# EAGLE board IR Interface Board (EAGLE 7.7.0)
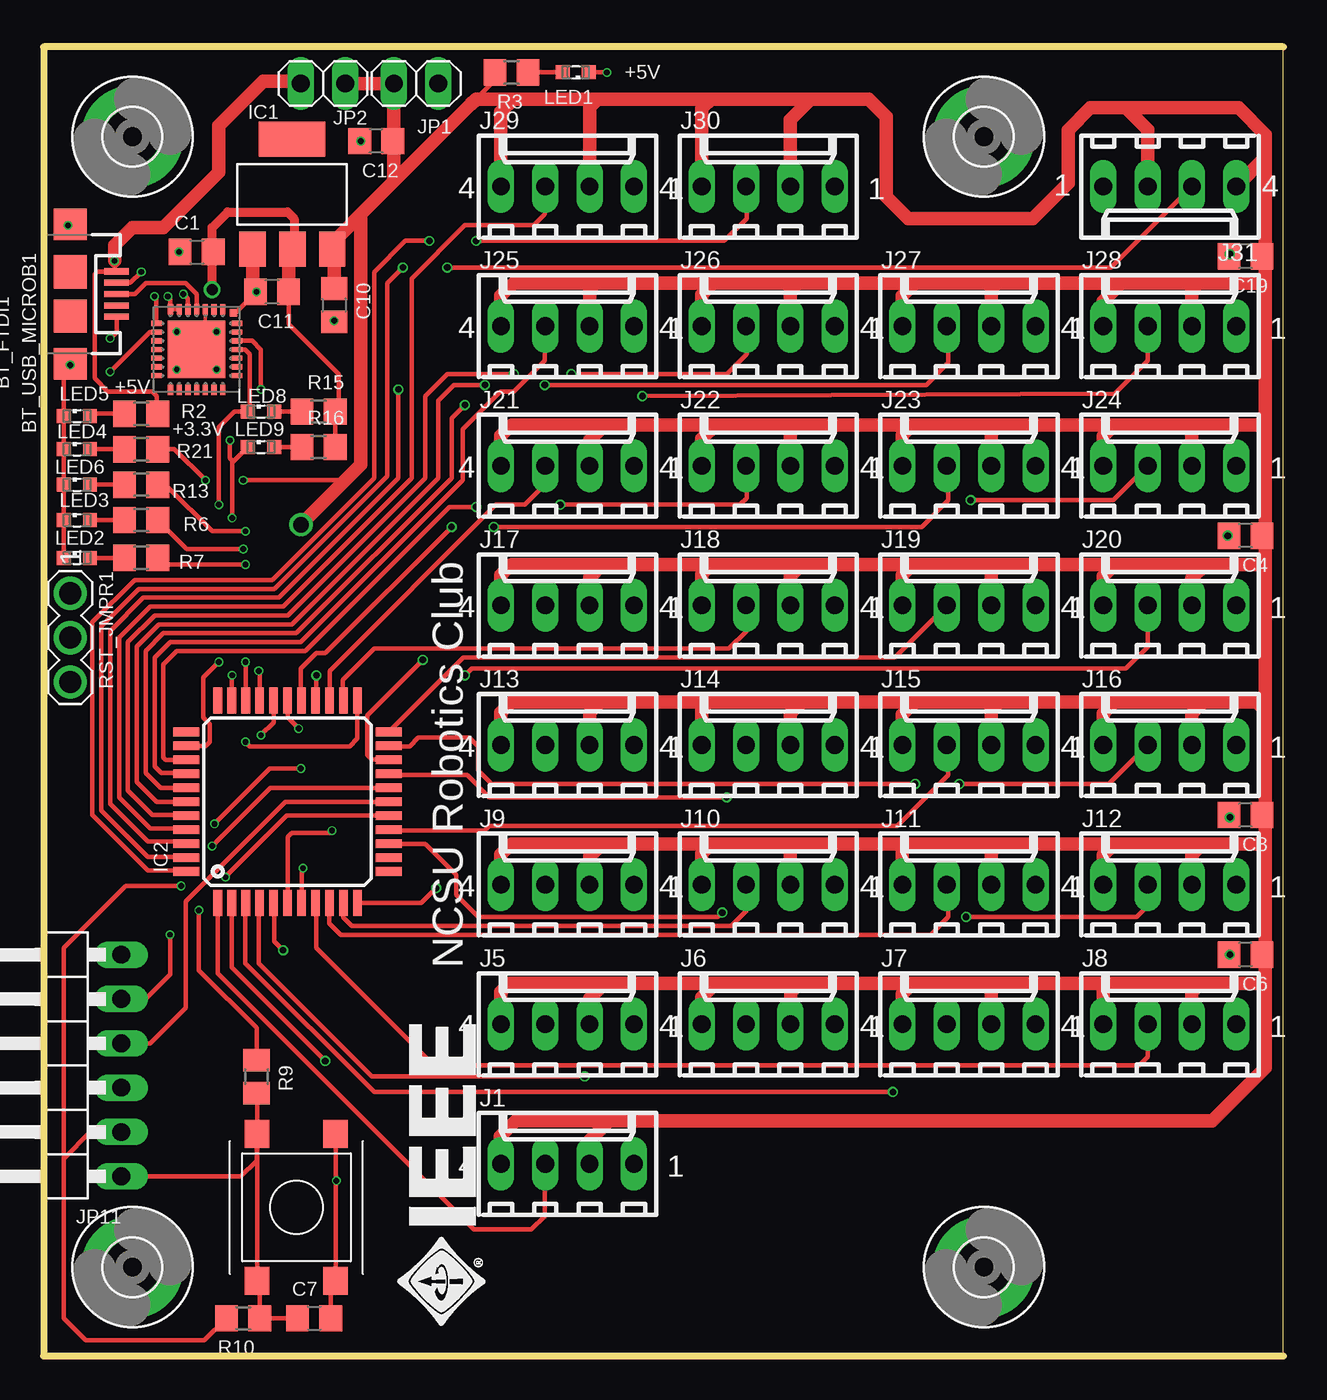
[diagram p0: board, top side]
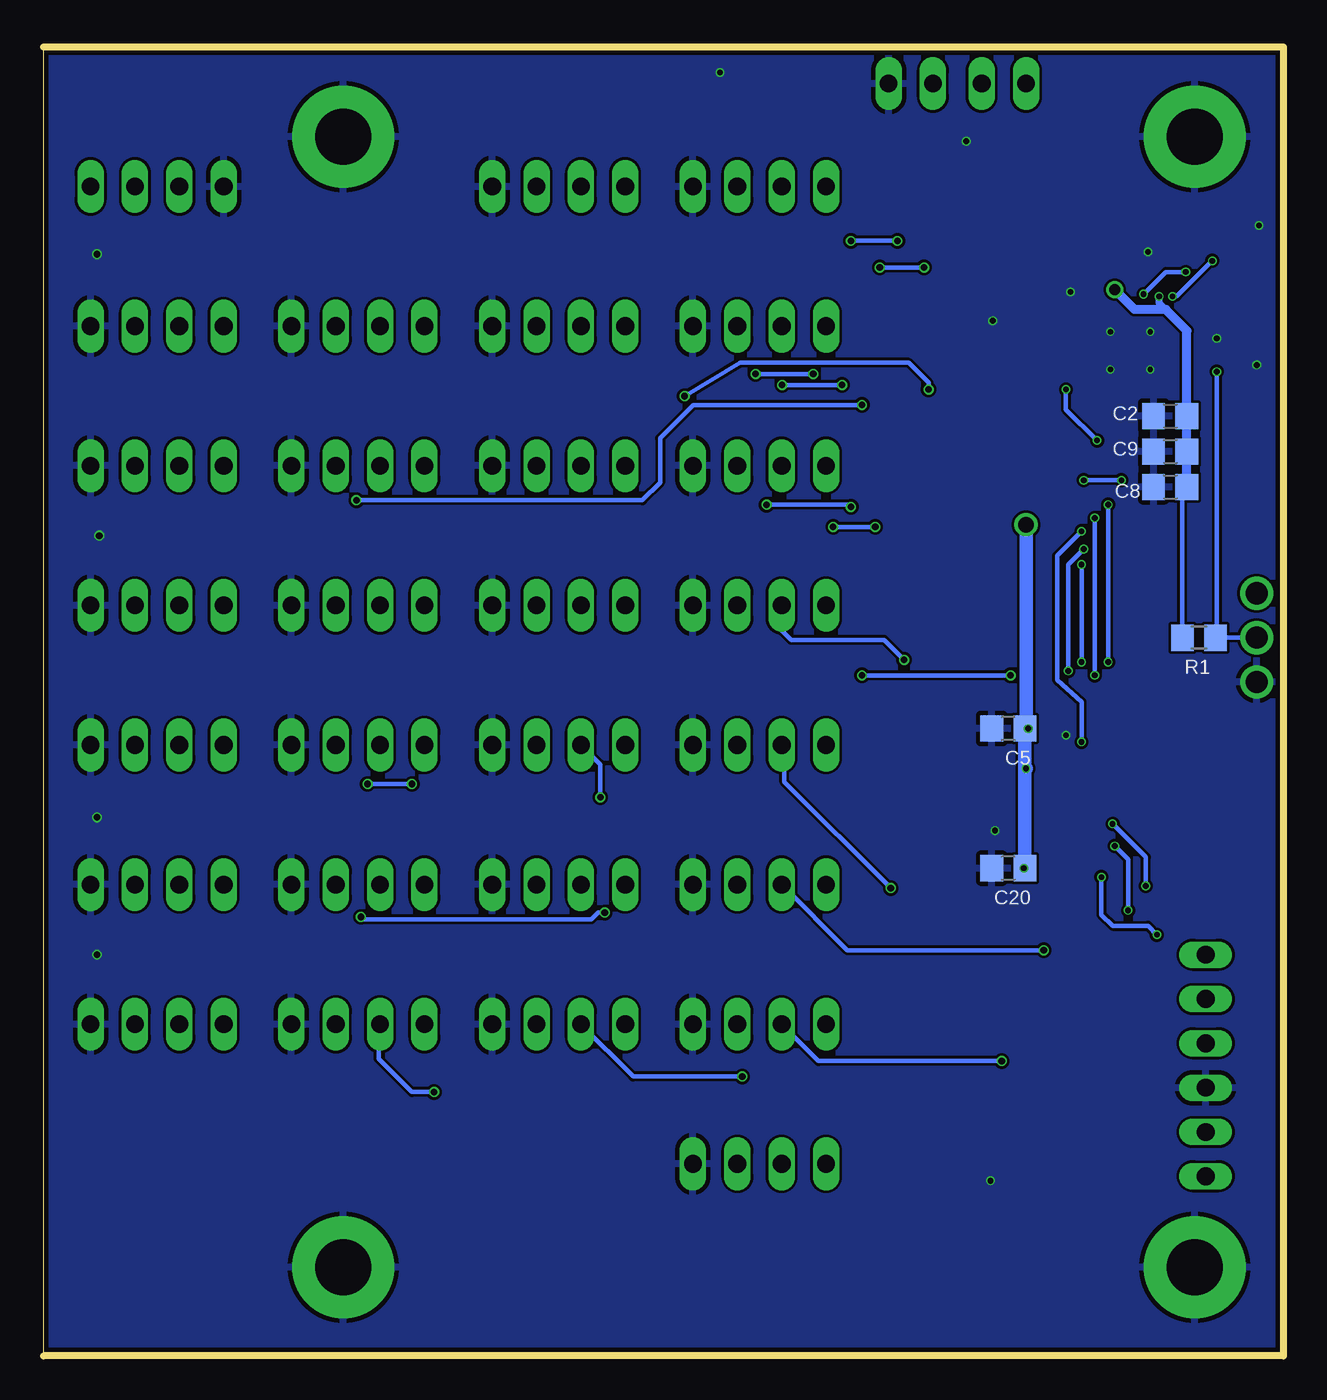
[diagram p1: board, bottom side, seen from below]

Size 71 x 75 mm. Coordinates in mm from the lower left corner, seen from the top.
Outline: 0,0 71,0 71,75 0,75 0,0
Copper layers (1*16): Top 0.035mm / dielectric 1.5mm / Bottom 0.035mm
Design rules "EagleRules-2-Layer-Shep": minimum track width 6mil, minimum drill 12mil, track to track 6mil, track to pad 6mil, pad to pad 6mil, via to via 6mil, smd to smd 0mil, copper to edge 10mil, drill to drill 10mil, minimum pad ring 2mil, minimum via ring 2mil, stop-mask expansion 2mil, vias tented up to drill 100mil, thermal gap 10mil

## Footprints (pad centres in the part's own frame; a part is rotated, then mirrored left to right if it is on the bottom)
MLP28 = smd 0.6 x 0.3: 1 -2.3,1.5; 2 -2.3,1; 3 -2.3,0.5; 4 -2.3,0; 5 -2.3,-0.5; 6 -2.3,-1; 7 -2.3,-1.5; 15 2.3,-1.5; 16 2.3,-1; 17 2.3,-0.5; 18 2.3,0; 19 2.3,0.5; 20 2.3,1; 21 2.3,1.5 | smd 0.3 x 0.6: 8 -1.5,-2.3; 9 -1,-2.3; 10 -0.5,-2.3; 11 0,-2.3; 12 0.5,-2.3; 13 1,-2.3; 14 1.5,-2.3; 22 1.5,2.3; 23 1,2.3; 24 0.5,2.3; 25 0,2.3; 26 -0.5,2.3; 27 -1,2.3; 28 -1.5,2.3 | smd 3.3 x 3.3: EXP 0,0 | smd 0.435 x 0.435: M -2.103,2.103
USB-MICROB = smd 0.35 x 1.4: D+ 0,2.65; D- -0.65,2.65; GND 1.3,2.65; ID 0.65,2.65; VBUS -1.3,2.65 | smd 1.8 x 1.9: MT1 -4,0; MT2 4,0 | smd 1.9 x 1.9: P$1 -1.27,0; P$2 1.27,0
C0805 = smd 1.3 x 1.5: 1 -0.95,0; 2 0.95,0
3,2-PAD = drill 3.2 pad 5.842: B3,2 0,0
SOT223 = smd 1.499 x 2.007: 1 -2.261,-3.15; 2 0.025,-3.15; 3 2.311,-3.15 | smd 3.81 x 2.007: 4 0,3.15
TQFP44 = smd 1.5 x 0.5: 1 -5.8,4; 2 -5.8,3.2; 3 -5.8,2.4; 4 -5.8,1.6; 5 -5.8,0.8; 6 -5.8,0; 7 -5.8,-0.8; 8 -5.8,-1.6; 9 -5.8,-2.4; 10 -5.8,-3.2; 11 -5.8,-4; 23 5.8,-4; 24 5.8,-3.2; 25 5.8,-2.4; 26 5.8,-1.6; 27 5.8,-0.8; 28 5.8,0; 29 5.8,0.8; 30 5.8,1.6; 31 5.8,2.4; 32 5.8,3.2; 33 5.8,4 | smd 0.5 x 1.5: 12 -4,-5.8; 13 -3.2,-5.8; 14 -2.4,-5.8; 15 -1.6,-5.8; 16 -0.8,-5.8; 17 0,-5.8; 18 0.8,-5.8; 19 1.6,-5.8; 20 2.4,-5.8; 21 3.2,-5.8; 22 4,-5.8; 34 4,5.8; 35 3.2,5.8; 36 2.4,5.8; 37 1.6,5.8; 38 0.8,5.8; 39 0,5.8; 40 -0.8,5.8; 41 -1.6,5.8; 42 -2.4,5.8; 43 -3.2,5.8; 44 -4,5.8
6410-04 = drill 1.016 long: 1 3.81,0; 2 1.27,0; 3 -1.27,0; 4 -3.81,0
1X02 = drill 1.016 long: 1 -1.27,0; 2 1.27,0
1X06/90 = drill 1.016 long: 1 -6.35,-3.81; 2 -3.81,-3.81; 3 -1.27,-3.81; 4 1.27,-3.81; 5 3.81,-3.81; 6 6.35,-3.81
SML0603 = smd 0.8 x 0.8: A 0.75,0; C -0.75,0
R0805 = smd 1.3 x 1.5: 1 -0.95,0; 2 0.95,0
MA03-1 = drill 1.27: 1 -2.54,0; 2 0,0; 3 2.54,0
MC32882_FINAL = smd 1.6 x 1.4: P$1 -4.2,-2.25; P$2 -4.2,2.25; P$3 4.2,2.25; P$4 4.2,-2.25

## Placement (x,y rotation side)
BT_FTDI1  CP2102  [MLP28]  8.76,57.66 270 top
BT_USB_MICROB1  USB-MICROB  [USB-MICROB]  1.52,60.83 270 top
C1  1uF  [C0805]  8.76,63.25 0 top
C2  0.1uF  [C0805]  6.48,53.85 0 bottom
C3  4.7uF  [C0805]  68.83,30.99 180 top
C4  4.7uF  [C0805]  68.83,46.99 180 top
C5  1uF  [C0805]  15.75,35.94 180 bottom
C6  4.7uF  [C0805]  68.83,22.99 180 top
C7  0.1uF  [C0805]  15.49,2.16 0 top
C8  0.1uF  [C0805]  6.48,49.78 0 bottom
C9  4.7uF  [C0805]  6.48,51.82 0 bottom
C10  10uF  [C0805]  16.64,60.2 270 top
C11  4.7uF  [C0805]  13.08,60.96 180 top
C12  10uF  [C0805]  19.05,69.6 180 top
C19  0.1uF  [C0805]  68.83,62.99 180 top
C20  1uF  [C0805]  15.75,27.94 180 bottom
H1  MOUNT-PAD-ROUND3.2  [3,2-PAD]  53.85,69.85 0 top
H2  MOUNT-PAD-ROUND3.2  [3,2-PAD]  53.85,5.08 0 top
H3  MOUNT-PAD-ROUND3.2  [3,2-PAD]  5.08,5.08 0 top
H4  MOUNT-PAD-ROUND3.2  [3,2-PAD]  5.08,69.85 0 top
IC1  REG1117  [SOT223]  14.22,66.55 0 top
IC2  PIC16F1517/19PT  [TQFP44]  13.97,31.75 90 top
J1  22-27-2041-04  [6410-04]  30,11 0 top
J5  22-27-2041-04  [6410-04]  30,19 0 top
J6  22-27-2041-04  [6410-04]  41.5,19 0 top
J7  22-27-2041-04  [6410-04]  53,19 0 top
J8  22-27-2041-04  [6410-04]  64.5,19 0 top
J9  22-27-2041-04  [6410-04]  30,27 0 top
J10  22-27-2041-04  [6410-04]  41.5,27 0 top
J11  22-27-2041-04  [6410-04]  53,27 0 top
J12  22-27-2041-04  [6410-04]  64.5,27 0 top
J13  22-27-2041-04  [6410-04]  30,35 0 top
J14  22-27-2041-04  [6410-04]  41.5,35 0 top
J15  22-27-2041-04  [6410-04]  53,35 0 top
J16  22-27-2041-04  [6410-04]  64.5,35 0 top
J17  22-27-2041-04  [6410-04]  30,43 0 top
J18  22-27-2041-04  [6410-04]  41.5,43 0 top
J19  22-27-2041-04  [6410-04]  53,43 0 top
J20  22-27-2041-04  [6410-04]  64.5,43 0 top
J21  22-27-2041-04  [6410-04]  30,51 0 top
J22  22-27-2041-04  [6410-04]  41.5,51 0 top
J23  22-27-2041-04  [6410-04]  53,51 0 top
J24  22-27-2041-04  [6410-04]  64.5,51 0 top
J25  22-27-2041-04  [6410-04]  30,59 0 top
J26  22-27-2041-04  [6410-04]  41.5,59 0 top
J27  22-27-2041-04  [6410-04]  53,59 0 top
J28  22-27-2041-04  [6410-04]  64.5,59 0 top
J29  22-27-2041-04  [6410-04]  30,67 0 top
J30  22-27-2041-04  [6410-04]  41.5,67 0 top
J31  22-27-2041-04  [6410-04]  64.5,67 180 top
JP1  [1X02]  21.34,72.9 0 top
JP2  [1X02]  16,72.9 0 top
JP11  [1X06/90]  0.64,16.64 90 top
LED1  [SML0603]  30.48,73.53 180 top
LED2  [SML0603]  1.91,45.72 0 top
LED3  [SML0603]  1.91,47.88 0 top
LED4  [SML0603]  1.91,51.94 0 top
LED5  [SML0603]  1.91,53.85 0 top
LED6  [SML0603]  1.91,49.91 0 top
LED8  [SML0603]  12.45,54.1 0 top
LED9  [SML0603]  12.45,52.07 0 top
R1  1k  [R0805]  4.83,41.15 180 bottom
R2  500  [R0805]  5.59,53.98 0 top
R3  500  [R0805]  26.8,73.53 180 top
R6  500  [R0805]  5.59,47.88 0 top
R7  500  [R0805]  5.59,45.72 0 top
R9  100  [R0805]  12.19,16 270 top
R10  10K  [R0805]  11.43,2.16 180 top
R13  500  [R0805]  5.59,49.91 0 top
R15  500  [R0805]  15.75,54.1 0 top
R16  500  [R0805]  15.75,52.07 0 top
R21  500  [R0805]  5.59,51.94 0 top
RST_JMPR1  [MA03-1]  1.52,41.15 270 top
TOUCH_RESET  RESET  [MC32882_FINAL]  14.48,8.51 90 top
U$1  LOGO  [IEEE-LOGO]  22.86,9.91 90 top

## Library data of the parts
BT_FTDI1 = silabs; MF: FARNELL; MPN: CP2102-GM; OC_FARNELL: 9282130; OC_NEWARK: 30K5635
BT_USB_MICROB1 = Mother-Board-rev5; PROD_ID: CONN-09505
C1-C12 C19 C20 R2 R3 R6 R7 R9 R10 R13 R15 R16 R21 = rcl
H1-H4 = holes
IC1 = burr-brown; MPN: REG1117; OC_FARNELL: 1097566; OC_NEWARK: 14P6981
IC2 = microchip
J1 J5-J31 = con-molex; OC_FARNELL: unknown; OC_NEWARK: unknown
JP1 JP2 JP11 = pinhead
LED1-LED6 LED8 LED9 = interface_board-rev13
R1 = resistor
RST_JMPR1 = con-lstb; OC_FARNELL: unknown; OC_NEWARK: unknown
TOUCH_RESET = power_lib
U$1 = IEEE-logo

## Nets
+3V3: BT_FTDI1.6 BT_FTDI1.7 C1.2 C2.2 C8.2 C9.2 C11.1 IC1.2 R1.2 R15.2 R16.2
+5V: C3.1 C4.1 C5.1 C6.1 C10.1 C12.1 C19.1 C20.1 IC1.3 IC2.7 IC2.28 J1.2 J1.4 J5.2 J5.4 J6.2 J6.4 J7.2 J7.4 J8.2 J8.4 J9.2 J9.4 J10.2 J10.4 J11.2 J11.4 J12.2 J12.4 J13.2 J13.4 J14.2 J14.4 J15.2 J15.4 J16.2 J16.4 J17.2 J17.4 J18.2 J18.4 J19.2 J19.4 J20.2 J20.4 J21.2 J21.4 J22.2 J22.4 J23.2 J23.4 J24.2 J24.4 J25.2 J25.4 J26.2 J26.4 J27.2 J27.4 J28.2 J28.4 J29.2 J29.4 J30.2 J30.4 J31.2 J31.4 JP1.1 JP2.2 JP11.2 R3.2 R10.2 R21.2
ADC_1: IC2.1 J1.3
ADC_2: IC2.2 J5.3
ADC_3: IC2.4 J6.3
ADC_4: IC2.3 J7.3
ADC_5: IC2.8 J8.3
ADC_6: IC2.5 J9.3
ADC_7: IC2.10 J10.3
ADC_8: IC2.9 J11.3
ADC_9: IC2.14 J12.3
ADC_10: IC2.11 J13.3
ADC_11: IC2.19 J14.3
ADC_12: IC2.15 J15.3
ADC_13: IC2.21 J16.3
ADC_14: IC2.20 J17.3
ADC_15: IC2.24 J18.3
ADC_16: IC2.22 J19.3
ADC_17: IC2.26 J20.3
ADC_18: IC2.25 J21.3
ADC_19: IC2.36 J22.3
ADC_20: IC2.27 J23.3
ADC_21: IC2.38 J24.3
ADC_22: IC2.37 J25.3
ADC_23: IC2.40 J26.3
ADC_24: IC2.39 J27.3
ADC_25: IC2.42 J28.3
ADC_26: IC2.41 J29.3
ADC_27: IC2.44 J30.3
ADC_28: IC2.43 J31.3
BT_D+1: BT_FTDI1.4 BT_USB_MICROB1.D+
BT_D-1: BT_FTDI1.5 BT_USB_MICROB1.D-
GND: BT_FTDI1.3 BT_FTDI1.EXP BT_FTDI1.M BT_USB_MICROB1.GND BT_USB_MICROB1.MT1 BT_USB_MICROB1.MT2 C1.1 C2.1 C3.2 C4.2 C5.2 C6.2 C7.2 C8.1 C9.1 C10.2 C11.2 C12.2 C19.2 C20.2 H1.B3,2 H2.B3,2 H3.B3,2 H4.B3,2 IC1.1 IC2.6 IC2.29 J1.1 J5.1 J6.1 J7.1 J8.1 J9.1 J10.1 J11.1 J12.1 J13.1 J14.1 J15.1 J16.1 J17.1 J18.1 J19.1 J20.1 J21.1 J22.1 J23.1 J24.1 J25.1 J26.1 J27.1 J28.1 J29.1 J30.1 J31.1 JP1.2 JP11.3 LED1.C LED2.C LED3.C LED4.C LED5.C LED6.C RST_JMPR1.3 TOUCH_RESET.P$1 TOUCH_RESET.P$4
ICDCLK: IC2.16 JP11.5
ICDDAT: IC2.17 JP11.4
MCLR: C7.1 JP11.1 R9.2 R10.1 TOUCH_RESET.P$2 TOUCH_RESET.P$3
MCLR`: IC2.18 R9.1
N$1: LED3.A R6.1
N$2: BT_FTDI1.9 R1.1 RST_JMPR1.2
N$3: LED6.A R13.1
N$4: LED1.A R3.1
N$6: LED2.A R7.1
N$8: LED4.A R21.1
N$10: LED8.A R15.1
N$11: LED9.A R16.1
N$12: LED5.A R2.1
NC_1_FTDI: BT_FTDI1.12
NC_2_FTDI: BT_FTDI1.11
NC_3_FTDI: BT_FTDI1.2
NC_4_FTDI: BT_FTDI1.1
NC_5_FTDI: BT_FTDI1.28
NC_6_FTDI: BT_FTDI1.27
NC_7_FTDI: BT_FTDI1.24
NC_8_FTDI: BT_FTDI1.23
STATUS_0: IC2.23 R13.2
STATUS_1: IC2.30 R6.2
STATUS_2: IC2.31 R7.2
UART_RX: BT_FTDI1.26 IC2.32 LED9.C
UART_TX: BT_FTDI1.25 IC2.35 LED8.C
VBUS: BT_FTDI1.8 BT_USB_MICROB1.VBUS JP2.1 R2.2

## Tracks (layer width: path | path; a pad name or v marks a point on that pad's centre or on a via)
+3V3  (via drill 0.33, 0.64)
  Top 0.254: R16.2 R15.2 16.89,54.3 16.89,56.26 14.03,59.12 C11.1 | BT_FTDI1.6 BT_FTDI1.7 7.26,60.55 v7.11,60.71 | C1.2 9.71,63.31 9.65,63.37
  Top 0.508: v9.65,61.09 9.65,63.37 9.65,64.64 10.54,65.53 13.97,65.53 14.35,65.15 14.35,63.5 IC1.2
  Top 0.762: C11.1 14.03,63.18 IC1.2
  Bottom 0.254: R1.2 5.78,49.53 C8.2
  Bottom 0.406: 6.73,59.94 7.11,60.33 v7.11,60.71
  Bottom 0.508: C8.2 C9.2 C2.2 5.53,58.74 6.73,59.94 8.51,59.94 v9.65,61.09
+5V  (via drill 0.33, 0.89)
  Top 0.254: 1.14,11.3 1.14,2.16 2.41,0.89 9.21,0.89 R10.2 | v14.61,35.94 13.97,36.58 IC2.28 | v14.86,27.94 14.77,27.85 IC2.7 | JP11.2 2.67,12.83 1.14,11.3 | 1.14,11.3 1.14,23.37 4.7,26.92 v7.87,26.92 | v9.78,30.48 12.95,33.66 v14.73,33.66 | R21.2 7.49,51.94 v9.27,50.16 | v11.43,50.16 17.27,50.16 | R3.2 25.85,73.09 24.45,71.69 | 26.16,11.03 J1.4
  Top 0.406: 42.8,19.03 J6.2
  Top 0.762: 26.92,72.01 24.77,72.01 24.45,71.69 20.07,67.31 | 26.92,72.01 31.75,72.01 | 31.75,72.01 38.23,72.01 | 38.23,72.01 43.94,72.01 | 43.94,72.01 47.24,72.01 48.26,70.99 48.26,66.42 49.53,65.15 56.64,65.15 58.67,67.18 58.67,70.23 59.94,71.5 61.98,71.5 | v14.73,47.62 17.27,50.16 18.16,51.05 18.16,65.41 | 18.16,65.41 20.07,67.31 | 20.07,69.6 JP1.1 JP2.2 | 20.07,69.6 20.07,67.31 | 18.16,65.41 16.89,64.14 16.89,63.75 IC1.3 16.64,63.3 C10.1 | C12.1 20.07,69.6 | 61.98,71.5 68.45,71.5 69.98,69.98 69.98,68.67 | 69.98,68.67 69.98,62.87 | 69.98,62.87 69.98,61.21 | 69.98,61.21 69.98,52.96 | 69.98,52.96 69.98,46.86 | 69.98,46.86 69.98,44.96 | 69.98,44.96 69.98,36.96 | 69.98,36.96 69.98,30.99 | 69.98,30.99 69.98,29.08 | 69.98,29.08 69.98,22.86 | 69.98,22.86 69.98,21.08 | 69.98,21.08 69.98,16.51 66.93,13.46 32.38,13.46 | C6.1 69.85,22.99 69.98,22.86 | 69.98,68.67 J31.4 | J31.2 63.23,70.25 61.98,71.5 | 31.62,61.47 26.92,61.47 26.19,60.73 J25.4 | 31.62,61.47 38.35,61.47 | 38.35,61.47 43.18,61.47 | 43.18,61.47 49.91,61.47 | 49.91,61.47 54.61,61.47 | 54.61,61.47 61.72,61.47 | 61.72,61.47 66.17,61.47 | 66.17,61.47 69.72,61.47 69.98,61.21 | 66.17,61.47 65.77,61.07 J28.2 | J25.2 31.27,61.12 31.62,61.47 | J26.4 37.69,60.8 38.35,61.47 | J26.2 42.77,61.06 43.18,61.47 | J27.4 49.19,60.75 49.91,61.47 | J27.2 54.27,61.13 54.61,61.47 | J28.4 60.69,60.44 61.72,61.47 | J21.4 26.19,52.73 26.8,53.34 32.13,53.34 | 32.13,53.34 38.48,53.34 | 38.48,53.34 43.18,53.34 | 43.18,53.34 49.78,53.34 | 49.78,53.34 54.74,53.34 | 54.74,53.34 61.34,53.34 | 61.34,53.34 66.04,53.34 | 66.04,53.34 69.6,53.34 69.98,52.96 | J21.2 31.27,52.48 32.13,53.34 | J22.4 37.69,52.55 38.48,53.34
  Top 0.762: J22.2 42.77,52.93 43.18,53.34 | J23.4 49.19,52.75 49.78,53.34 | J23.2 54.27,52.87 54.74,53.34 | J24.4 60.69,52.69 61.34,53.34 | J24.2 65.77,53.07 66.04,53.34 | J17.4 26.19,44.73 26.8,45.34 32,45.34 | 32,45.34 38.23,45.34 | 38.23,45.34 43.43,45.34 | 43.43,45.34 49.78,45.34 | 49.78,45.34 54.74,45.34 | 54.74,45.34 61.34,45.34 | 61.34,45.34 66.55,45.34 | 66.55,45.34 69.6,45.34 69.98,44.96 | J17.2 31.27,44.6 32,45.34 | J18.4 37.69,44.8 38.23,45.34 | J18.2 42.77,44.67 43.43,45.34 | J19.4 49.19,44.74 49.78,45.34 | J19.2 54.27,44.87 54.74,45.34 | J20.4 60.69,44.69 61.34,45.34 | J20.2 65.77,44.56 66.55,45.34 | C4.1 69.85,46.99 69.98,46.86 | J13.4 26.19,36.86 26.8,37.47 31.88,37.47 | 31.88,37.47 38.1,37.47 | 38.1,37.47 43.43,37.47 | 43.43,37.47 49.91,37.47 | 49.91,37.47 54.74,37.47 | 54.74,37.47 61.34,37.47 | 61.34,37.47 66.42,37.47 | 66.42,37.47 69.47,37.47 69.98,36.96 | J13.2 31.27,36.86 31.88,37.47 | J14.4 37.69,37.05 38.1,37.47 | J14.2 42.77,36.8 43.43,37.47 | J15.4 49.19,36.74 49.91,37.47 | J15.2 54.27,37 54.74,37.47 | J16.4 60.69,36.81 61.34,37.47 | J16.2 65.77,36.81 66.42,37.47 | J9.4 26.19,28.73 26.8,29.34 32,29.34 | 32,29.34 38.23,29.34 | 38.23,29.34 43.18,29.34 | 43.18,29.34 49.53,29.34 | 49.53,29.34 54.74,29.34 | 54.74,29.34 61.34,29.34 | 61.34,29.34 66.42,29.34 | 66.42,29.34 69.72,29.34 69.98,29.08 | J9.2 31.27,28.6 32,29.34 | J10.4 37.69,28.8 38.23,29.34 | J10.2 42.77,28.93 43.18,29.34 | J11.4 49.19,29 49.53,29.34 | J11.2 54.27,28.87 54.74,29.34 | J12.4 60.69,28.69 61.34,29.34 | J12.2 65.77,28.69 66.42,29.34 | J5.4 26.19,20.86 26.67,21.34 32.13,21.34 | 32.13,21.34 38.48,21.34 | 38.48,21.34 43.31,21.34 | 43.31,21.34 49.78,21.34 | 49.78,21.34 54.74,21.34
  Top 0.762: 54.74,21.34 60.96,21.34 | 60.96,21.34 66.29,21.34 | 66.29,21.34 69.72,21.34 69.98,21.08 | J5.2 31.27,20.48 32.13,21.34 | J6.4 37.69,20.55 38.48,21.34 | 42.8,19.03 42.8,20.83 43.31,21.34 | J7.4 49.19,20.74 49.78,21.34 | J7.2 54.27,20.87 54.74,21.34 | J8.4 60.69,21.07 60.96,21.34 | J8.2 65.77,20.81 66.29,21.34 | C19.1 69.85,62.99 69.98,62.87 | 26.16,11.03 26.16,12.57 27.05,13.46 32.38,13.46 | J1.2 31.27,12.35 32.38,13.46 | J29.4 26.19,71.28 26.92,72.01 | J29.2 31.27,71.53 31.75,72.01 | J30.4 37.69,71.47 38.23,72.01 | J30.2 42.77,70.84 43.94,72.01 | C3.1 69.98,30.99
  Bottom 0.254: C5.1 v14.61,35.94 | C20.1 v14.86,27.94 | v7.87,26.92 7.87,28.57 v9.78,30.48 | v9.27,50.16 v11.43,50.16
  Bottom 0.762: v14.73,47.62 14.73,35.88 C5.1 14.8,33.72 v14.73,33.66 14.8,33.59 C20.1
ADC_1
  Top 0.254: IC2.1 9.97,21.91 24.64,7.24 27.94,7.24 28.7,8 28.7,10.97 J1.3
ADC_2  (via drill 0.38)
  Top 0.254: IC2.2 10.77,22.25 v16.13,16.89
  Bottom 0.254: v16.13,16.89 26.62,16.89 J5.3
ADC_3  (via drill 0.38)
  Top 0.254: IC2.4 12.32,25.9 12.32,22.48 18.8,16 v30.99,16
  Bottom 0.254: v30.99,16 37.23,16 J6.3
ADC_4  (via drill 0.38)
  Top 0.254: IC2.3 11.56,25.94 11.56,22.48 18.92,15.11 v48.64,15.11
  Bottom 0.254: v48.64,15.11 49.91,15.11 51.82,17.02 51.82,18.91 J7.3
ADC_5
  Top 0.254: IC2.8 15.62,25.9 15.62,23.37 22.35,16.64 62.74,16.64 63.25,17.14 63.25,18.98 J8.3
ADC_6  (via drill 0.38)
  Top 0.254: IC2.5 13.21,25.91 13.21,23.75 v13.72,23.24
  Bottom 0.254: v13.72,23.24 24.97,23.24 J9.3
ADC_7
  Top 0.254: 17.14,25.93 IC2.10 17.17,25.12 17.65,24.64 39.37,24.64 40.26,25.53 40.26,26.97 J10.3
ADC_8
  Top 0.254: 16.38,25.94 IC2.9 16.37,24.78 17.02,24.13 50.8,24.13 51.82,25.15 51.82,26.91 J11.3
ADC_9  (via drill 0.38)
  Top 0.254: IC2.14 19.78,29.34 21.84,29.34 23.62,27.56 23.62,26.42 24.89,25.15 38.61,25.15 v38.86,25.4 | v52.83,25.15 62.61,25.15 63.25,25.78 63.25,26.98 J12.3
  Bottom 0.254: v38.86,25.4 39.24,25.4 39.62,25.02 52.7,25.02 v52.83,25.15
ADC_10  (via drill 0.38)
  Top 0.254: IC2.11 21.63,25.95 v22.48,26.8
  Bottom 0.254: v22.48,26.8 28.57,32.89 28.57,34.84 J13.3
ADC_11  (via drill 0.38)
  Top 0.254: IC2.19 19.85,33.27 24.26,33.27 25.53,32 v39.12,32
  Bottom 0.254: v39.12,32 39.12,33.89 J14.3
ADC_12
  Top 0.254: IC2.15 19.82,30.1 25.27,30.1 25.53,30.35 48.9,30.35 51.82,33.27 51.82,34.91 J15.3
ADC_13  (via drill 0.38)
  Top 0.254: IC2.21 19.8,34.92 20.95,34.92 21.46,35.43 24.38,35.43 24.89,34.92 24.89,33.53 25.65,32.77 v49.91,32.77 | v52.45,32.77 61,32.77 J16.3
  Bottom 0.254: v49.91,32.77 v52.45,32.77
ADC_14  (via drill 0.38)
  Top 0.254: IC2.20 19.78,34.16 18.8,34.16 18.54,34.42 18.54,36.7 v21.72,39.88
  Bottom 0.254: v21.72,39.88 22.86,41.02 28.19,41.02 28.73,41.56 J17.3
ADC_15
  Top 0.254: IC2.24 17.14,37.58 17.14,38.73 18.92,40.51 39.24,40.51 40.26,41.53 40.26,42.97 J18.3
ADC_16
  Top 0.254: IC2.22 24.02,40.01 48.73,40.01 J19.3
ADC_17  (via drill 0.38)
  Top 0.254: IC2.26 15.62,37.6 v15.62,38.99 | v24.13,38.99 24.51,39.37 61.98,39.37 63.23,40.62 J20.3
  Bottom 0.254: v15.62,38.99 v24.13,38.99
ADC_18
  Top 0.254: IC2.25 16.38,37.56 16.38,39.24 25.91,48.77 27.56,48.77 28.7,49.91 28.7,50.97 J21.3
ADC_19  (via drill 0.38)
  Top 0.254: 8.16,34.16 IC2.36 7,34.15 6.86,34.29 6.86,39.62 7.62,40.39 14.99,40.39 23.24,48.64 v24.77,48.64 | v29.59,48.77 39.88,48.77 40.26,49.15 40.26,50.97 J22.3
  Bottom 0.254: v24.77,48.64 24.89,48.77 v29.59,48.77
ADC_20  (via drill 0.38)
  Top 0.254: IC2.27 14.73,37.59 14.73,39.37 15.62,40.26 16.13,40.26 v23.37,47.5 | v25.78,47.5 50.29,47.5 51.82,49.02 51.82,50.91 J23.3
  Bottom 0.254: v23.37,47.5 v25.78,47.5
ADC_21  (via drill 0.38)
  Top 0.254: 8.13,32.51 IC2.38 6.69,32.55 5.84,33.4 5.84,40.39 6.86,41.4 14.48,41.4 23.37,50.29 23.37,53.72 v24.13,54.48 | v53.09,49.02 61.25,49.02 J24.3
  Bottom 0.254: v24.13,54.48 33.78,54.48 35.69,52.58 35.69,50.04 36.7,49.02 v53.09,49.02
ADC_22
  Top 0.254: IC2.37 8.12,33.4 6.73,33.4 6.35,33.78 6.35,40.01 7.24,40.89 14.73,40.89 24,50.16 24,53.09 26.16,55.24 26.92,55.24 28.7,57.02 28.7,58.97 J25.3
ADC_23  (via drill 0.38)
  Top 0.254: IC2.40 8.13,30.99 6.22,30.99 4.83,32.38 4.83,40.89 6.35,42.42 13.97,42.42 21.84,50.29 21.84,54.99 23.11,56.26 v26.92,56.26 | v30.23,56.26 39.12,56.26 40.26,57.4 40.26,58.97 J26.3
  Bottom 0.254: v26.92,56.26 v30.23,56.26
ADC_24  (via drill 0.38)
  Top 0.254: IC2.39 6.48,31.75 5.33,32.89 5.33,40.64 6.6,41.91 14.22,41.91 22.61,50.29 22.61,54.74 23.5,55.63 v25.27,55.63 | v28.7,55.63 50.55,55.63 51.82,56.9 51.82,58.91 J27.3
  Bottom 0.254: v25.27,55.63 v28.7,55.63
ADC_25  (via drill 0.38)
  Top 0.254: IC2.42 8.06,29.46 5.97,29.46 3.81,31.62 3.81,41.53 5.71,43.43 13.46,43.43 20.32,50.29 v20.32,55.37 | v34.29,54.99 61.34,55.12 63.25,57.02 63.25,58.98 J28.3
  Bottom 0.254: v20.32,55.37 20.32,55.75 21.46,56.9 31.11,56.9 v34.29,54.99
ADC_26
  Top 0.254: IC2.41 8.09,30.23 6.1,30.23 4.32,32 4.32,41.15 6.1,42.93 13.72,42.93 21.08,50.29 21.08,61.72 24.13,64.77 28.07,64.77 28.7,65.41 28.7,66.97 J29.3
ADC_27  (via drill 0.38)
  Top 0.254: IC2.44 8.11,27.81 5.97,27.81 2.79,30.99 2.79,42.04 5.21,44.45 13.08,44.45 18.92,50.29 18.92,62.1 20.7,63.88 v22.1,63.88 | v24.77,63.88 38.99,63.88 40.26,65.15 40.26,66.97 J30.3
  Bottom 0.254: v22.1,63.88 v24.77,63.88
ADC_28  (via drill 0.38)
  Top 0.254: IC2.43 8.14,28.57 5.97,28.57 3.3,31.24 3.3,41.78 5.46,43.94 13.21,43.94 19.68,50.42 19.68,61.47 v20.57,62.36 | v23.11,62.36 61.13,62.36 J31.3
  Bottom 0.254: v20.57,62.36 v23.11,62.36
BT_D+1
  Top 0.254: BT_FTDI1.4 8.76,60.83 8.13,61.47 5.84,61.47 5.21,60.83 BT_USB_MICROB1.D+
BT_D-1  (via drill 0.33)
  Top 0.254: BT_FTDI1.5 8.26,60.57 v8,60.83 | BT_USB_MICROB1.D- 4.97,61.48 v5.59,62.1
  Bottom 0.254: v5.59,62.1 6.73,62.1 v8,60.83
GND  (via drill 0.3, 0.33, 0.38)
  Top 0.203: BT_FTDI1.3 9.26,58.29 | 9.26,58.29 8.63,58.79 BT_FTDI1.EXP | 9.26,58.29 v9.91,58.67
  Top 0.254: C7.2 16.44,4.03 TOUCH_RESET.P$1 TOUCH_RESET.P$4 16.73,10.2 v16.76,10.03 | IC2.29 13.17,36.28 v12.45,35.56 | LED2.C LED3.C LED6.C LED4.C LED5.C 1.16,56.46 BT_USB_MICROB1.MT2 v1.52,56.77 | BT_USB_MICROB1.GND 4.17,58.66 v3.81,58.29 | BT_USB_MICROB1.MT1 1.46,64.83 v1.4,64.77 | BT_FTDI1.M 10.99,59.76 v12.19,60.96 | IC2.6 13.97,29.72 14.22,29.97 16.38,29.97 v16.51,30.1 | LED1.C v32.26,73.53 | C1.1 v7.75,63.25
  Top 0.762: C10.2 v16.64,59.31 | IC1.1 11.96,61.13 C11.2 v12.19,60.96 | C12.2 v18.16,69.6 | C6.2 v67.94,22.99 | C3.2 67.88,30.92 v67.94,30.86 | C4.2 v67.82,46.99 | C19.2 67.88,63.06 v67.94,63.12
  other vias: 7.62,56.52 9.91,56.52 7.62,58.67
  pour Bottom: 0,0 0,74.93 74.93,74.93 74.93,0
ICDCLK  (via drill 0.33)
  Top 0.254: IC2.16 13.93,30.95 v10.41,27.43 | v7.24,24.13 7.24,21.84 5.71,20.32 4.57,20.32 JP11.5
  Bottom 0.254: v10.41,27.43 10.41,25.27 9.78,24.64 7.75,24.64 v7.24,24.13
ICDDAT
  Top 0.254: IC2.17 13.84,31.75 8.13,26.04 8.13,19.94 6.1,17.91 JP11.4
MCLR
  Top 0.254: C7.1 R10.1 12.38,4.16 TOUCH_RESET.P$2 TOUCH_RESET.P$3 | JP11.1 11.3,10.29 12.19,11.18 12.19,12.67 TOUCH_RESET.P$3 | TOUCH_RESET.P$3 12.23,15.02 R9.2
MCLR`  (via drill 0.33)
  Top 0.254: IC2.18 12.99,32.55 v9.65,29.21 | R9.1 12.19,18.8 8.89,22.1 v8.89,25.53
  Bottom 0.254: v8.89,25.53 8.89,28.45 v9.65,29.21
N$1
  Top 0.254: LED3.A R6.1
N$2  (via drill 0.33)
  Top 0.254: v3.81,56.39 6.08,58.66 BT_FTDI1.9
  Bottom 0.254: RST_JMPR1.2 R1.1 3.81,41.21 v3.81,56.39
N$3
  Top 0.254: LED6.A R13.1
N$4
  Top 0.254: R3.1 LED1.A
N$6
  Top 0.254: LED2.A R7.1
N$8
  Top 0.254: LED4.A R21.1
N$10
  Top 0.254: LED8.A R15.1
N$11
  Top 0.254: LED9.A R16.1
N$12
  Top 0.254: R2.1 2.78,53.98 LED5.A
STATUS_0  (via drill 0.33)
  Top 0.254: IC2.23 17.97,35.37 17.53,34.92 11.81,34.92 v11.56,35.18 | R13.2 6.67,49.78 7.11,49.78 9.65,47.24 v11.56,47.24
  Bottom 0.254: v11.56,47.24 12.95,45.85 12.95,38.73 11.56,37.47 v11.56,35.18
STATUS_1  (via drill 0.33)
  Top 0.254: IC2.30 12.37,39.19 v12.32,39.24 | v11.43,46.23 8.19,46.23 R6.2
  Bottom 0.254: v12.32,39.24 12.32,45.34 v11.43,46.23
STATUS_2  (via drill 0.33)
  Top 0.254: IC2.31 11.57,39.74 v11.56,39.75 | v11.56,45.34 6.92,45.34 R7.2
  Bottom 0.254: v11.56,39.75 v11.56,45.34
UART_RX  (via drill 0.33)
  Top 0.254: IC2.32 10.77,38.96 v10.79,38.99 | v10.79,48.01 10.79,51.17 10.86,51.24 | 10.86,51.24 LED9.C | v10.67,52.45 10.67,51.44 10.86,51.24 | BT_FTDI1.26 11.95,58.16 12.45,57.66 v12.45,55.37
  Bottom 0.254: v10.79,38.99 v10.79,48.01 | v12.45,55.37 12.45,54.23 v10.67,52.45
UART_TX  (via drill 0.33)
  Top 0.254: IC2.35 9.3,34.95 9.53,35.18 9.53,36.2 9.14,36.58 9.14,38.86 v10.03,39.75 | v10.03,48.77 10.03,53.21 10.92,54.1 LED8.C 11.81,54.22 11.81,57.4 11.56,57.66 BT_FTDI1.25
  Bottom 0.254: v10.03,39.75 v10.03,48.77
VBUS  (via drill 0.33)
  Top 0.254: R2.2 6.48,54.04 6.48,54.99 6.22,55.24 3.68,55.24 2.92,56.01 2.92,61.98 3.08,62.13 BT_USB_MICROB1.VBUS 4.06,62.24 v4.06,62.74 | BT_FTDI1.8 6.46,60.59 v6.35,60.71
  Top 0.762: v4.06,62.74 4.06,63.63 5.08,64.64 6.86,64.64 10.03,67.82 10.03,70.48 12.57,73.03 14.61,73.03 JP2.1
  Bottom 0.254: v6.35,60.71 6.1,60.71 v4.06,62.74

## Text on the board
tPlace: +5V | +5V | +3.3V | NCSU Robotics Club